# Altium PCB PCB2.PcbDoc
Units mm, origin at the board's own origin, x right, y up, seen from the top; angles counter-clockwise.
Board outline 32.51 x 48.51 mm, 2 copper layers (Top Layer, Bottom Layer); 29 components, 26 nets, 142 pads, 33 vias.
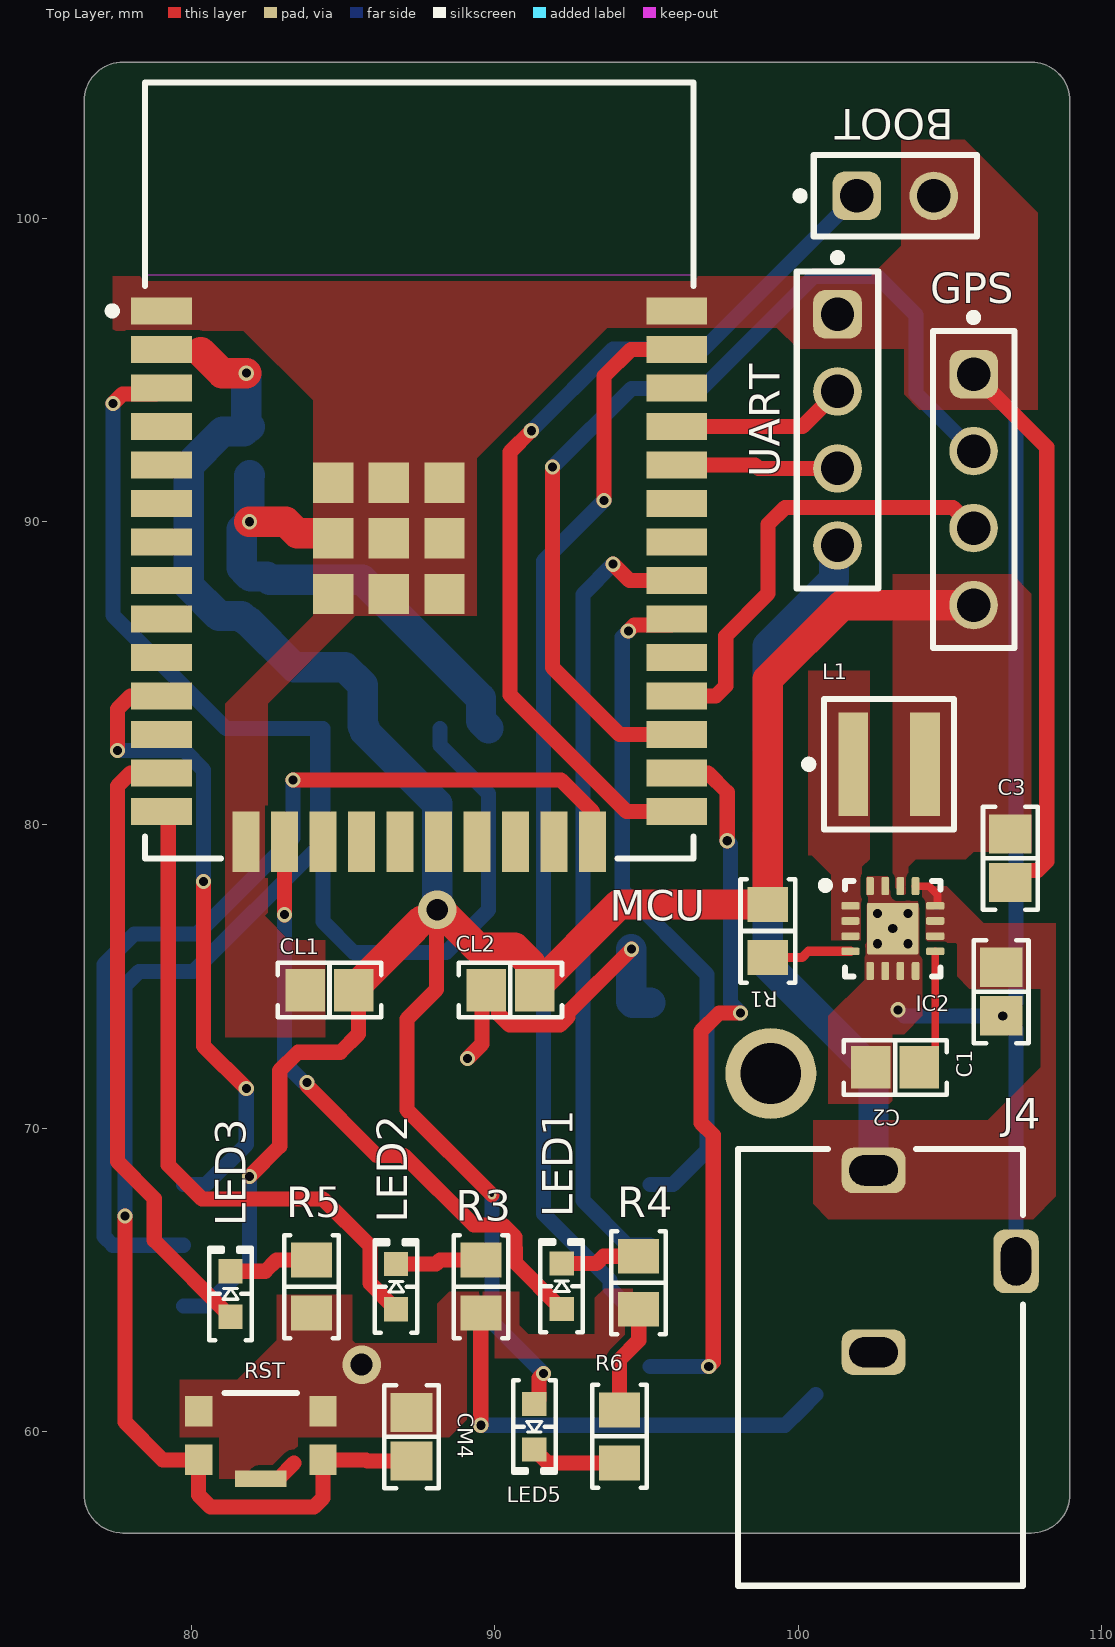
[diagram p0: Top Layer view]
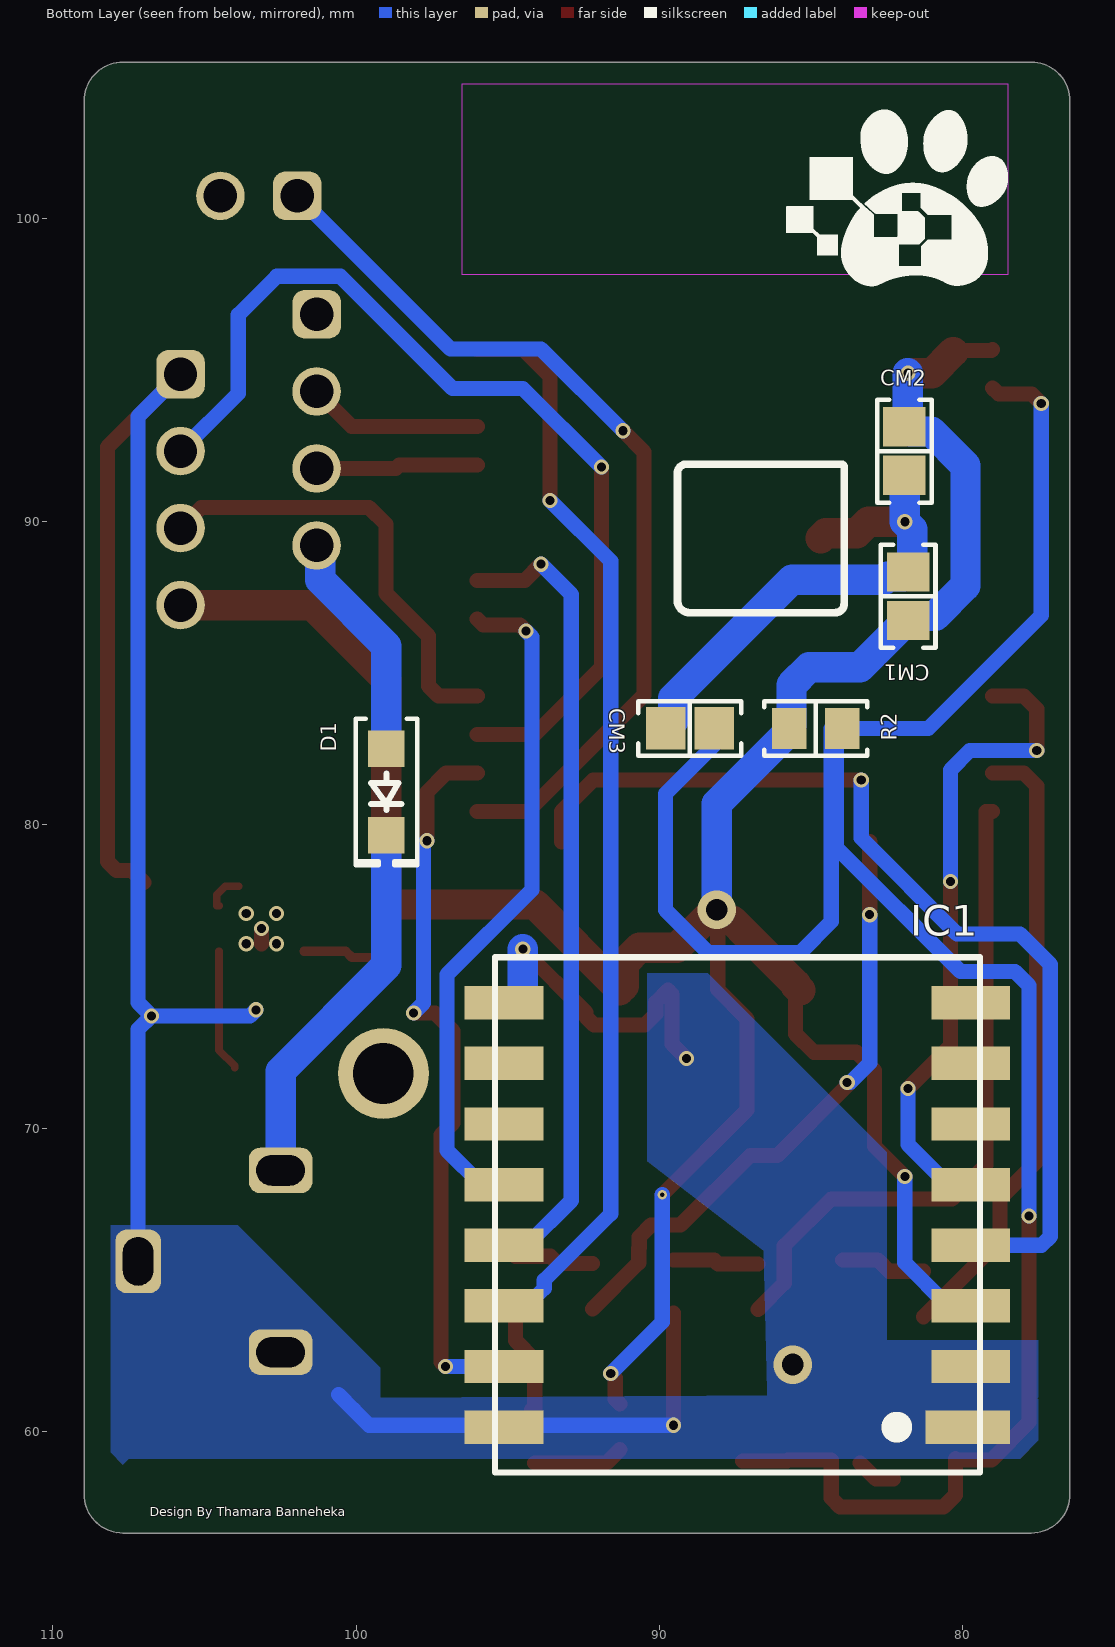
[diagram p1: Bottom Layer view, seen from below]
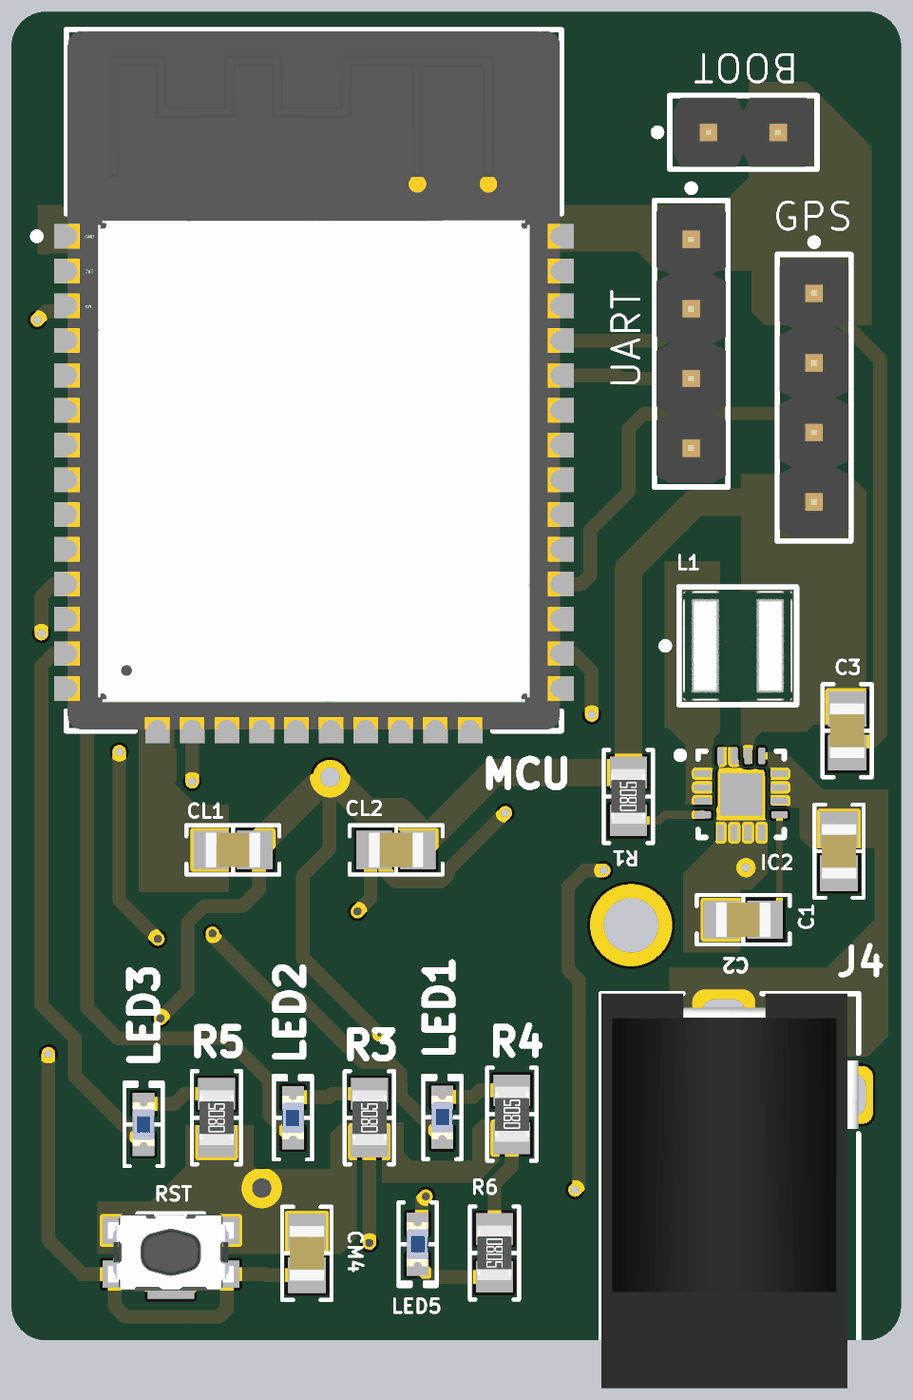
[diagram p2: 3D render of the assembled board from above, using the file's embedded part models]
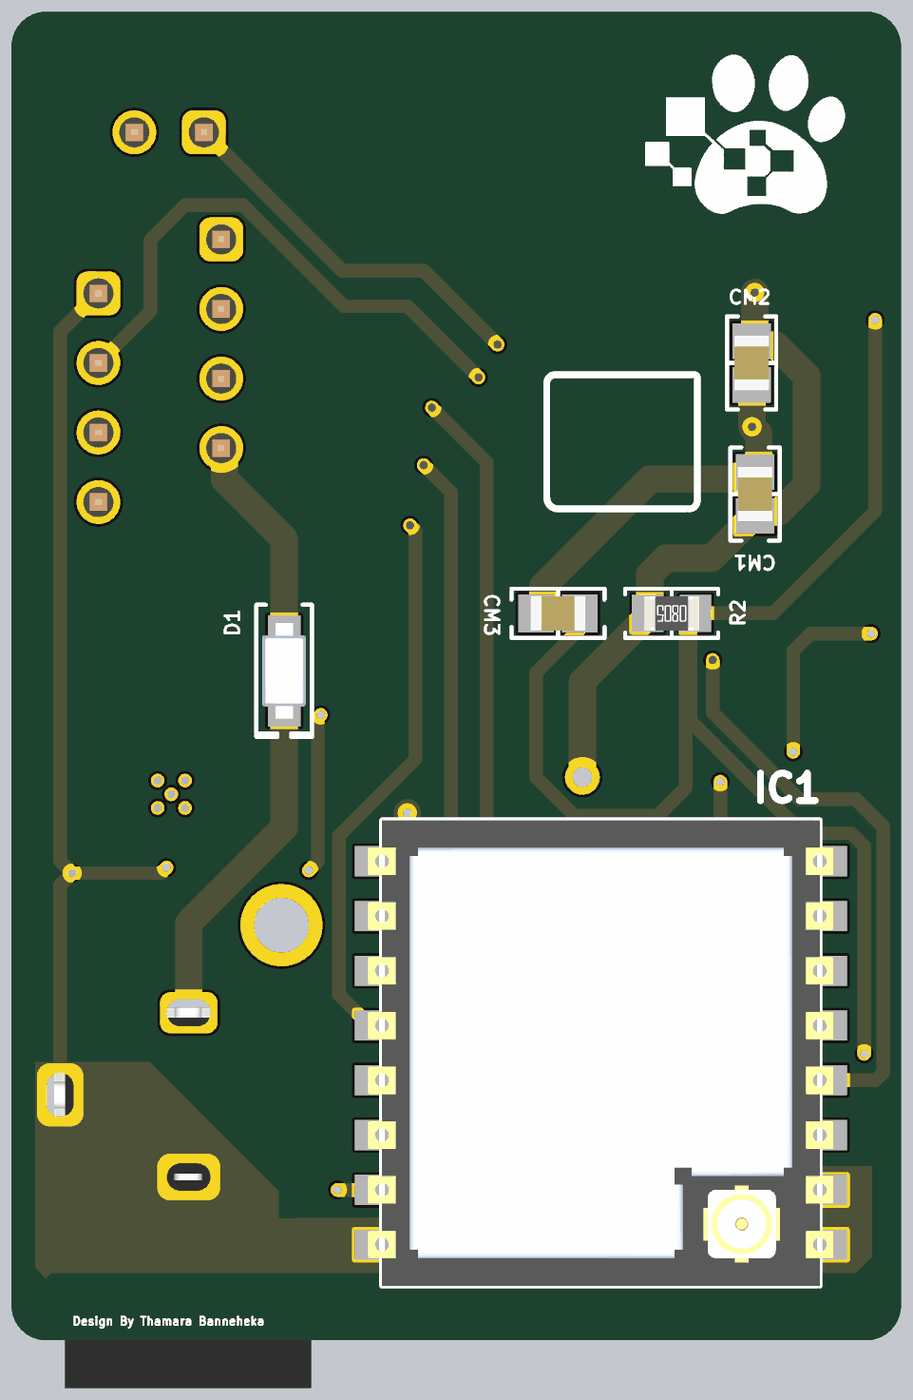
[diagram p3: 3D render of the assembled board from below, using the file's embedded part models]

## Layer stack, top to bottom
Top Solder: solder mask 0.0102, Solder Resist, Dk 3.5
Top Layer: signal copper 0.0356
Dielectric 1: dielectric 0.32, FR-4, Dk 4.8
Bottom Layer: signal copper 0.0356
Bottom Solder: solder mask 0.0102, Solder Resist, Dk 3.5

## Board outline
76.454,57.912 ccw(c77.724,57.912) 77.724,56.642 107.696,56.642 ccw(c107.696,57.912) 108.966,57.912 108.966,103.886 ccw(c107.696,103.886) 107.696,105.156 77.724,105.156 ccw(c77.724,103.886) 76.454,103.886

## Design rules (kind name [scope] priority, off if disabled: settings)
Clearance [All] p1: gap=0.2 ignorepadtopadclearanceinfootprint=FALSE
PolygonConnect [All] p1: connectstyle=Direct reliefconductorwidth=0.254 reliefentries=4 polygonreliefangle="90 Angle" airgapwidth=0.254
RoutingVias [All] p1: holewidth=0.15 width=0.3 viastyle="Through Hole" minholewidth=0.1 minwidth=0.25 maxholewidth=1 maxwidth=1.27
SolderMaskExpansion [All] p1: expansion=0.102 istentingtop=FALSE
SupplyNets "Schematic Supply Nets_2" [InNet('VIN')] p1: voltage=0.000
SupplyNets "Schematic Supply Nets_1" [InNet('GND')] p2: voltage=0.000
SupplyNets "Schematic Supply Nets" [InNet('3V3')] p3: voltage=0.000
UnConnectedPin [All] p1:
UnRoutedNet [All] p1: checkbadconnections=TRUE
UnpouredPolygon [All] p1: allowunpoured=TRUE allowshelved=TRUE
Width [All] p1: maxlimit=3 minlimit=0.254 preferedwidth=0.5 minimp=50.000000 maximp=50.000000 favimp=50.000000
28 further rules are at their usual default settings.

## Components (designator, comment, footprint, x,y, rotation, side; value= is the part's Value field where it differs from the comment)
BOOT "CMP-011-000133-1" 61300211121 103.206,100.75 r0 top
C1 "10 µF" "CAP 0805_2012" 106.7,74.5 r90 top
C2 "3300 pF" "CAP 0805_2012" 103.2,72 r0 top
C3 "0.022 µF" "CAP 0805_2012" 107,78.9 r90 top
CL1 "22 µF" "CAP 0805_2012" 84.544,74.549 r0 top
CL2 "0.1 µF" "CAP 0805_2012" 90.513,74.549 r0 top
CM1 "22 µF" "CAP 0805_2012" 81.788,87.541 r270 bottom
CM2 "0.1 µF" "CAP 0805_2012" 81.915,92.329 r90 bottom
CM3 "0.1 µF" "CAP 0805_2012" 88.989,83.185 r180 bottom
CM4 "0.1 µF" "CAP 0805_2012" 87.249,59.817 r270 top
D1 "1N4007FLTR" SOD123F 99,81.087 r270 bottom
GPS "CMP-011-000141-1" 61300411121 105.791,91.059 r270 top
IC1 "RA-02" RA-02 87.423,67.135 r0 bottom locked
IC2 "TPS62152RGTR" RGT0016C_V 103.124,76.581 r0 top locked
J4 "PJ-102AH" "CUI PJ-102AH" 102.489,62.103 r180 top
L1 "2.2uH" FP-XFL4020-MFG 103,82 r0 top
LED1 "Blue" "LED 0603_1608 BLUE" 92.202,64.782 r90 top
LED2 "Blue" "LED 0603_1608 BLUE" 86.741,64.77 r90 top
LED3 "Blue" "LED 0603_1608 BLUE" 81.28,64.528 r90 top
LED5 "Blue" "LED 0603_1608 BLUE" 91.3,60.15 r270 top
MCU "ESP32-WROOM-32" FP-ESP32-WROOM-32-MFG 87.503,91.694 r0 top locked
R1 "100 k" "RES 0805_2012" 99,76.5 r90 top
R2 "10 k" "RES 0805_2012" 84.836,83.185 r0 bottom
R3 "1 k" "RES 0805_2012" 89.535,64.77 r90 top
R4 "1 k" "RES 0805_2012" 94.742,64.897 r90 top
R5 "1 k" "RES 0805_2012" 83.947,64.77 r90 top
R6 "1 k" "RES 0805_2012" 94.107,59.831 r270 top
RST "KMR221GLFS" SW_KMR221GLFS 82.278,59.855 r180 top
UART "CMP-011-000141-1" 61300411121 101.3,93.03 r270 top

## Footprints (in the part's own frame and the unit in brackets; to place one, negate y for a bottom-side part, rotate by r counter-clockwise, add the part's x,y. Pads: shape width x height; smd on the part's side, far side on the other; paste and mask are expansions set on the pad)
61300211121 [mm] "Pin Header, pitch 2.54 mm, THT, Vertical, single row, 2p"
  rrect50% 1.6x1.6 hole 1.1: 1(-1.27,0)
  round 1.6 hole 1.1: 2(1.27,0)
  silkscreen extent -3.26,-1.34 2.69,1.35, body extent -2.54,-1.27 2.54,1.27, height 8.57
61300411121 [mm] "Pin Header, pitch 2.54 mm, THT, Vertical, single row, 4p"
  rrect50% 1.6x1.6 hole 1.1: 1(-3.81,0)
  round 1.6 hole 1.1: 2(-1.27,0) 3(1.27,0) 4(3.81,0)
  silkscreen extent -5.8,-1.34 5.23,1.34, body extent -5.08,-1.27 5.08,1.27, height 8.57
"CAP 0805_2012" [mm] "Chip Capacitor, 2-Leads, Body 2.00x1.20mm, IPC Medium Density"
  rect 1.3x1.4 smd: 1(-0.8,0) 2(0.8,0)
  silkscreen extent -1.7,-0.9 1.7,0.9, body extent -1,-0.64 1,0.64, height 1.26
"CUI PJ-102AH" [mm] "DC Barrel Jack W/ Switch 2.0x5.5"
  rrect50% 2.1x1.5 hole 1 slot 1.6 at 0 deg: 1(0,-6.5) 2(0,-0.5)
  rrect50% 1.5x2.1 hole 1 slot 1.6 at 90 deg: 3(-4.7,-3.5)
  silkscreen extent -4.93,-7.2 4.48,7.2, body extent -4.92,-7.2 4.47,7.2, height 11
FP-ESP32-WROOM-32-MFG [mm]
  rect 2x0.9 smd paste+0 mask+0: 1(-8.5,5.26) 2(-8.5,3.99) 3(-8.5,2.72) 4(-8.5,1.45) 5(-8.5,0.18) 6(-8.5,-1.09) 7(-8.5,-2.36) 8(-8.5,-3.63) 9(-8.5,-4.9) 10(-8.5,-6.17) 11(-8.5,-7.44) 12(-8.5,-8.71) 13(-8.5,-9.98) 14(-8.5,-11.25) 25(8.5,-11.25) 26(8.5,-9.98) 27(8.5,-8.71) 28(8.5,-7.44) 29(8.5,-6.17) 30(8.5,-4.9) 31(8.5,-3.63) 32(8.5,-2.36) 33(8.5,-1.09) 34(8.5,0.18) 35(8.5,1.45) 36(8.5,2.72) 37(8.5,3.99) 38(8.5,5.26)
  rect 0.9x2 smd paste+0 mask+0: 15(-5.715,-12.25) 16(-4.445,-12.25) 17(-3.175,-12.25) 18(-1.905,-12.25) 19(-0.635,-12.25) 20(0.635,-12.25) 21(1.905,-12.25) 22(3.175,-12.25) 23(4.445,-12.25) 24(5.715,-12.25)
  rect 1.33x1.33 smd paste+0 mask+0: 39(-2.835,-4.075) 39(-2.835,-2.24) 39(-2.835,-0.405) 39(-1,-4.075) 39(-1,-2.24) 39(-1,-0.405) 39(0.835,-4.075) 39(0.835,-2.24) 39(0.835,-0.405)
  Keep-Out Layer region: -9,6.45 9,6.45 9,12.75 -9,12.75
  Keep-Out Layer region: -9,6.45 9,6.45 9,12.75 -9,12.75
  silkscreen extent -10.25,-12.8 9.05,12.8, body extent -9.6,-13.35 9.6,12.9, height 0.25
FP-XFL4020-MFG [mm]
  rect 0.98x3.4 smd paste+0 mask+0: 1(-1.185,0) 2(1.185,0)
  silkscreen extent -2.77,-2.15 2.15,2.15, body extent -2.25,-2.25 2.25,2.25, height 0.25
"LED 0603_1608 BLUE" [mm] "Chip Diode, 2-Leads, Body 1.60x0.80mm, IPC Medium Density"
  rect 0.8x0.8 smd: 1(-0.75,0) 2(0.75,0)
  silkscreen extent -1.52,-0.7 1.52,0.7, body extent -0.8,-0.4 0.8,0.4, height 0.53
RA-02 [mm]
  rect 2.8x1.1 smd: 1(-7.6,7)
  rect 2.6x1.1 smd: 2(-7.7,5) 3(-7.7,3) 4(-7.7,1) 5(-7.7,-1) 6(-7.7,-3) 7(-7.7,-5) 8(-7.7,-7) 9(7.7,-7) 10(7.7,-5) 11(7.7,-3) 12(7.7,-1) 13(7.7,1) 14(7.7,3) 15(7.7,5) 16(7.7,7)
  silkscreen extent -8,-8.5 8,8.5, body extent -8.5,-8.5 8.5,8.5, height 3.3
"RES 0805_2012" [mm] "Chip Resistor, 2-Leads, Body 2.00x1.25mm, IPC Medium Density"
  rect 1.15x1.35 smd: 1(-0.875,0) 2(0.875,0)
  silkscreen extent -1.7,-0.9 1.7,0.9, body extent -1,-0.62 1,0.63, height 0.6
RGT0016C_V [mm] "QFN, 16-Leads, Body 3x3mm, Pitch 0.5mm, Thermal Pad 1.65x1.65mm"
  rrect40% 0.6x0.25 smd: 1(-1.4,0.75) 2(-1.4,0.25) 3(-1.4,-0.25) 4(-1.4,-0.75) 9(1.4,-0.75) 10(1.4,-0.25) 11(1.4,0.25) 12(1.4,0.75)
  rrect40% 0.25x0.6 smd: 5(-0.75,-1.4) 6(-0.25,-1.4) 7(0.25,-1.4) 8(0.75,-1.4) 13(0.75,1.4) 14(0.25,1.4) 15(-0.25,1.4) 16(-0.75,1.4)
  rrect6% 1.7x1.7 smd paste-0.85: 17(0,0)
  rrect6% 1.55x1.55 on Top Paste: 17(0,0)
  silkscreen extent -2.35,-1.58 1.58,1.58, body extent -1.5,-1.5 1.5,1.5, height 1
SOD123F [mm] "SODFL, 2-Leads, Body 1.60x3.50mm, IPC Medium Density"
  rect 1.2x1.2 smd: 1(-1.43,0) 2(1.43,0)
  silkscreen extent -2.41,-1.02 2.41,1.02, body extent -1.75,-0.8 1.75,0.8, height 1.1
SW_KMR221GLFS [mm]
  rect 0.9x1 smd: 1(-2.05,0.8) 2(-2.05,-0.8) 3(2.05,-0.8) 4(2.05,0.8)
  rect 1.7x0.55 smd: 5(0,1.425)
  silkscreen extent -1.2,-1.4 1.2,-1.4, body extent -2.3,-1.4 2.3,1.4, height 1.9

## Part data
BOOT: "WR-PHD Pin Header, THT, Vertical, pitch 2.54mm, 1 Row, 2P", Contact Resistance=20mOhm, manufacturer="Wurth Elektronik", Manufacturer Part Number=61300211121, Operating Temperature Max=105°C, Operating Temperature Min=-40°C, Rated Current=3A, Withstanding Voltage=500V, Working Voltage=250V, Category="Board-to-Board Connectors", Component Type=Standard, componentlink1description="Website Link", componentlink1url=https://www.we-online.com/redexpert/article/61300211121?ad, componentlink2description="Datasheet Link", componentlink2url=https://www.we-online.com/redexpert/spec/61300211121?ad, Design Item ID=61300211121, Gender="Pin Header", Match Code=WR-PHD, Mount="Through Hole", Number of Pins=2, Number of Rows=1, Orientation=Vertical, packaging=Bag, Pin Count=2, Pitch=2.54mm, Source=WR-PHD.SchLib
C1: library part C2012X6S1C106K125AC, "CAP CER 10UF 16V X6S 0805", Device Package="0805 (2012 Metric)", manufacturer="TDK Corporation", Operating Temperature="-55°C ~ 105°C", Supplier Part Number 1=445-7611-1-ND, Temperature Coefficient=X6S, Tolerance=±10%, Voltage - Rated=16V, Applications="General Purpose", Capacitance="10 µF", componentlink1description=Datasheet, componentlink1url=https://product.tdk.com/info/en/catalog/datasheets/mlcc_commercial_general_en.pdf?ref_disty=digikey, componentlink2description="DigiKey Link", componentlink2url=https://www.digikey.com/en/products/detail/tdk-corporation/C2012X6S1C106K125AC/2733046, Features="Low ESL", lastupdated="2/9/2024 8:16:08 PM", Lifecycle Status=Active, Minimum Order=1, Mounting Type="Surface Mount, MLCC", Package / Case="0805 (2012 Metric)", packaging=TapeAndReel, Part Number=C2012X6S1C106K125AC, Part Status=Active, partid=2995, price=0.06, series=C, Size / Dimension="0.079\" L x 0.049\" W (2.00mm x 1.25mm)", Supplier 1=DigiKey, Thickness (Max)="0.057\" (1.45mm)"
C2: library part C0805C332F5GECAUTO, "CAP CER 0805 3.3NF 50V C0G 1%", Capacitance="3.3 nF", Device Package="0805 (2012 Metric)", manufacturer=KEMET, Operating Temperature="-55°C ~ 125°C", Ratings=AEC-Q200, Supplier Part Number 1=399-C0805C332F5GECAUTOCT-ND, Temperature Coefficient="C0G, NP0", Tolerance=±1%, Voltage - Rated=50V, Applications="Automotive, ESD Protection", componentlink1description=Datasheet, componentlink1url=https://api.kemet.com/component-edge/download/datasheet/C0805C332F5GECAUTO.pdf, componentlink2description="DigiKey Link", componentlink2url=https://www.digikey.com/en/products/detail/kemet/C0805C332F5GECAUTO/8647273, Features="Low ESL", lastupdated="2/9/2024 8:15:00 PM", Lifecycle Status=Active, Minimum Order=1, Mounting Type="Surface Mount, MLCC", Package / Case="0805 (2012 Metric)", packaging=TapeAndReel, Part Number=C0805C332F5GECAUTO, Part Status=Active, partid=41544, price=0.27, series="ESD SMD Auto C0G", Size / Dimension="0.079\" L x 0.049\" W (2.00mm x 1.25mm)", Supplier 1=DigiKey, Thickness (Max)="0.035\" (0.88mm)"
C3: library part C0805C223K5RECAUTO, "CAP CER 0805 22NF 50V X7R 10%", Capacitance="22 uF", Device Package="0805 (2012 Metric)", manufacturer=KEMET, Operating Temperature="-55°C ~ 125°C", Ratings=AEC-Q200, Supplier Part Number 1=399-17886-1-ND, Temperature Coefficient=X7R, Tolerance=±10%, Voltage - Rated=50V, Applications="Automotive, ESD Protection", componentlink1description=Datasheet, componentlink1url=https://api.kemet.com/component-edge/download/datasheet/C0805C223K5RECAUTO.pdf, componentlink2description="DigiKey Link", componentlink2url=https://www.digikey.com/en/products/detail/kemet/C0805C223K5RECAUTO/8640480, lastupdated="2/9/2024 8:15:30 PM", Lifecycle Status=Active, Minimum Order=1, Mounting Type="Surface Mount, MLCC", Package / Case="0805 (2012 Metric)", packaging=TapeAndReel, Part Number=C0805C223K5RECAUTO, Part Status=Active, partid=15719, price=0.04, series="ESD SMD Auto X7R", Size / Dimension="0.079\" L x 0.049\" W (2.00mm x 1.25mm)", Supplier 1=DigiKey, Thickness (Max)="0.035\" (0.88mm)"
CL1 CM1: library part CL21A226KOQNNNG, "CAP CER 22UF 16V X5R 0805", Device Package="0805 (2012 Metric)", manufacturer="Samsung Electro-Mechanics", Operating Temperature="-55°C ~ 85°C", Supplier Part Number 1=1276-7092-1-ND, Temperature Coefficient=X5R, Tolerance=±10%, Voltage - Rated=16V, Applications="General Purpose", Capacitance="22 µF", componentlink1description=Datasheet, componentlink1url=//media.digikey.com/pdf/Data%20Sheets/Samsung%20PDFs/CL21A226KOQNNNG_Spec.pdf, componentlink2description="DigiKey Link", componentlink2url=https://www.digikey.com/en/products/detail/samsung-electro-mechanics/CL21A226KOQNNNG/3894433, lastupdated="2/9/2024 8:16:07 PM", Lifecycle Status=Active, Minimum Order=1, Mounting Type="Surface Mount, MLCC", Package / Case="0805 (2012 Metric)", packaging=TapeAndReel, Part Number=CL21A226KOQNNNG, Part Status=Active, partid=3000, price=0.06, series=CL, Size / Dimension="0.079\" L x 0.049\" W (2.00mm x 1.25mm)", Supplier 1=DigiKey, Thickness (Max)="0.055\" (1.40mm)"
CL2 CM2 CM3 CM4: library part CC0805MRX7R9BB104, "CAP CER 0.1UF 50V X7R 0805", Device Package="0805 (2012 Metric)", manufacturer=Yageo, Operating Temperature="-55°C ~ 125°C", Supplier Part Number 1=311-4351-1-ND, Temperature Coefficient=X7R, Tolerance=±20%, Voltage - Rated=50V, Applications="General Purpose", Capacitance="0.1 µF", componentlink1description=Datasheet, componentlink1url=https://www.yageo.com/upload/media/product/productsearch/datasheet/mlcc/UPY-GPHC_X7R_6.3V-to-50V_18.pdf, componentlink2description="DigiKey Link", componentlink2url=https://www.digikey.com/en/products/detail/yageo/CC0805MRX7R9BB104/5884281, lastupdated="2/9/2024 8:16:09 PM", Lifecycle Status=Active, Minimum Order=1, Mounting Type="Surface Mount, MLCC", Package / Case="0805 (2012 Metric)", packaging=TapeAndReel, Part Number=CC0805MRX7R9BB104, Part Status=Active, partid=2475, price=0.01, series=CC, Size / Dimension="0.079\" L x 0.049\" W (2.00mm x 1.25mm)", Supplier 1=DigiKey, Thickness (Max)="0.037\" (0.95mm)"
D1: "STANDARD RECTIFIER 1000V SOD-123", Capacitance @ Vr, F="15pF @ 4V, 1MHz", Current - Average Rectified (Io)=1A, Current - Reverse Leakage @ Vr="5µA @ 1000V", manufacturer="SMC Diode Solutions", Package / Case=SOD-123F, Supplier Device Package=SOD-123FL, Supplier Part Number 1=1655-1N4007FLCT-ND, Voltage - DC Reverse (Vr) (Max)=1000V, Voltage - Forward (Vf) (Max) @ If="1.1V @ 1A", componentlink1description=Datasheet, componentlink1url=http://www.smc-diodes.com/propdf/1N4001FL-1N4007FL%20N1646%20REV.A.pdf, componentlink2description="DigiKey Link", componentlink2url=http://digikey.com/product-detail/en/smc-diode-solutions/1N4007FLTR/1655-1N4007FLCT-ND/11657827, Diode Type=Standard, lastupdated="8/30/2020 8:59:55 PM", Lifecycle Status=Active, Minimum Order=1, Mounting Type="Surface Mount", packaging=TapeAndReel, Part Number=1N4007FLTR, partid=3314, price=0.01, Speed="Standard Recovery >500ns, > 200mA (Io)", Supplier 1=DigiKey
GPS UART: "WR-PHD Pin Header, THT, Vertical, pitch 2.54mm, 1 Row, 4P", Contact Resistance=20mOhm, manufacturer="Wurth Elektronik", Manufacturer Part Number=61300411121, Operating Temperature Max=105°C, Operating Temperature Min=-40°C, Rated Current=3A, Withstanding Voltage=500V, Working Voltage=250V, Category="Board-to-Board Connectors", Component Type=Standard, componentlink1description="Website Link", componentlink1url=https://www.we-online.com/redexpert/article/61300411121?ad, componentlink2description="Datasheet Link", componentlink2url=https://www.we-online.com/redexpert/spec/61300411121?ad, Design Item ID=61300411121, Gender="Pin Header", Match Code=WR-PHD, Mount="Through Hole", Number of Pins=4, Number of Rows=1, Orientation=Vertical, packaging=Bag, Pin Count=4, Pitch=2.54mm, Source=WR-PHD.SchLib
IC1: library part CMP-006-000001-1, "General ISM < 1GHz LoRaâ„¢ Transceiver Module 410MHz ~ 525MHz Antenna Not Included, I-PEX Surface Mount", Package=None, Availability="Not in stock", Check_prices=https://www.snapeda.com/parts/RA-02/AI-Thinker/view-part/?ref=eda, Component Type=Standard, Design Item ID=RA-02, MF=Ai-Thinker, MP=RA-02, Pin Count=16, price=None, SnapEDA_Link=https://www.snapeda.com/parts/RA-02/AI-Thinker/view-part/?ref=snap, Source=RA-02.SchLib
IC2: library part CMP-0323-00110-3, "Buck Step Down Regulator with 3 to 17 V Input and 3.3 V Output, -40 to 85 degC, 16-Pin QFN (RGT), Green (RoHS & no Sb/Br)", manufacturer="Texas Instruments", Rating=Catalog, Switch Current Limit(Typ)(A)=1.7, Code_JEDEC=MO-220, componentlink1description=Datasheet, componentlink1url=http://www.ti.com/general/docs/lit/getliterature.tsp?genericPartNumber=TPS62152&fileType=pdf, componentlink2description="Package Specification", componentlink2url=http://www.ti.com/litv/pdf/mpqf119g, ComponentLink3Description="URL Link1", ComponentLink3URL="Samples URL:http://www.ti.com/product/tps62152#samples", DatasheetVersion=SLVSAL5, Duty Cycle(Max)(%)=100, Eco-Plan="Green (RoHS & no Sb/Br)", Iout(Max)(A)=1, Iq(Typ)(mA)=0.017, Mounting Technology="Surface Mount", PackageDescription="16-Pin Plastic Quad Flat No-Lead, 3 x 3 mm Body, 0.5 mm Pitch, 1.7 x 1.7 mm Exposed Pad", PackageReference=RGT0016C, PackageVersion="revH, Oct-2011", PartNumber=TPS62152RGTR, Preset Vout(V)=3.3, Regulated Outputs(#)=1, SubFamily="Step-Down Regulator", Synchronous Rectification=TRUE, Topology=Buck, Vin(Max)(V)=17, Vin(Min)(V)=3, Vout(Max)(V)=3.3, Vout(Min)(V)=3.3
J4: "CONN PWR JACK 2X5.5MM SOLDER", Current Rating (Amps)=5A, manufacturer="CUI Devices", Material Flammability Rating="UL94 V-0", Supplier Part Number 1=CP-102AH-ND, Voltage - Rated=24VDC, Actual Diameter="0.079\" (2.00mm ID), 0.256\" (6.50mm OD)", componentlink1description=Datasheet, componentlink1url=https://www.cuidevices.com/product/resource/digikeypdf/pj-102ah.pdf, componentlink2description="DigiKey Link", componentlink2url=//digikey.com/product-detail/en/cui-devices/PJ-102AH/CP-102AH-ND/408448, Connector Type=Jack, Gender=Male, Industry Recognized Mating Diameter="2.00mm ID (0.079\"), 5.50mm OD (0.217\")", Internal Switch(s)="Single Switch, Normally Closed", lastupdated="12/16/2019 7:01:27 PM", Lifecycle Status=0, Mating Length/Depth="0.354\" (9.00mm)", Minimum Order=1, Mounting Type="Through Hole, Right Angle", Number of Positions/Contacts="2 Conductors, 3 Contacts", packaging=Tray, Part Number=PJ-102AH, Part Status=Active, price=0.76, series=-, Shielding=Unshielded, Supplier 1=DigiKey, Termination=Solder
L1: library part CMP-2000-05090-4, "INDUCTOR, 2.2UH, 8A, 20%, 38MHZ, REEL", Case/Package=SMD/SMT, DC Resistance (DCR)=23.5mR, Inductance Tolerance=20%, Max DC Current=8A, Max Operating Temperature=125°C, Min Operating Temperature=-40°C, Saturation Current=3.1A, Self Resonant Frequency=38MHz, Test Frequency=100kHz, Core Material=Composite, Height=2.1mm, Inductance=2.2uH, Lead Free="Contains Lead", Length=4.3mm, Mount="Surface Mount", packaging="Tape and Reel", REACH SVHC="No SVHC", RMS Current (Irms)=8A, RoHS Compliant=Yes, series=XFL4020, Shielding=Shielded, Termination=SMD/SMT, Tolerance=20%, Width=4.3mm
LED1 LED2 LED3: library part SM0603UBWC, "LED BLUE CLEAR 0603 SMD", Current - Test=20mA, Device Package="0603 (1608 Metric)", Lens Color=Colorless, manufacturer="Bivar Inc.", Millicandela Rating=115mcd, Supplier Device Package=0603, Supplier Part Number 1=492-1327-1-ND, Voltage - Forward (Vf) (Typ)=3V, Color=Blue, componentlink1description=Datasheet, componentlink1url=https://www.bivar.com/Files/Datasheets/SM0603UBWC.pdf, componentlink2description="DigiKey Link", componentlink2url=https://www.digikey.com/en/products/detail/bivar-inc/SM0603UBWC/2408546, Configuration=Standard, Height (Max)=0.80mm, lastupdated="6/3/2024 7:57:52 PM", Lens Size="1.00mm x 0.80mm", Lens Style="Rectangle with Flat Top", Lens Transparency=Clear, Lifecycle Status=Active, Minimum Order=1, Mounting Type="Surface Mount", Package / Case="0603 (1608 Metric)", packaging=TapeAndReel, Part Number=SM0603UBWC, Part Status=Active, partid=807, price=0.46, series=-, Size / Dimension="1.60mm L x 0.80mm W", Supplier 1=DigiKey, Viewing Angle=130°, Wavelength - Dominant=470nm, Wavelength - Peak=468nm
LED5: library part LSM0603463V, "LED BLUE CLEAR CHIP 0603 SMD", Current - Test=20mA, Device Package="0603 (1608 Metric)", Lens Color=Colorless, manufacturer="Visual Communications Company - VCC", Millicandela Rating=20mcd, Supplier Device Package="Chip LED", Supplier Part Number 1=LSM0603463VCT-ND, Voltage - Forward (Vf) (Typ)=3V, Color=Blue, componentlink1description=Datasheet, componentlink1url=https://vcclite.com/wp-content/uploads/wpallimport/files/files/LSM0603463V.pdf, componentlink2description="DigiKey Link", componentlink2url=https://www.digikey.com/en/products/detail/visual-communications-company-vcc/LSM0603463V/9486725, Configuration=Standard, Height (Max)=0.50mm, lastupdated="6/3/2024 7:57:52 PM", Lens Size="1.20mm x 0.80mm", Lens Style="Rectangle with Flat Top", Lens Transparency=Clear, Lifecycle Status=Active, Minimum Order=1, Mounting Type="Surface Mount", Package / Case="0603 (1608 Metric)", packaging=TapeAndReel, Part Number=LSM0603463V, Part Status=Active, partid=781, price=0.12, series=LSM0603, Size / Dimension="1.60mm L x 0.80mm W", Supplier 1=DigiKey, Viewing Angle=120°, Wavelength - Dominant=469nm, Wavelength - Peak=469nm
MCU: library part CMP-194065-000008-1, "RX TXRX MOD WIFI SURFACE MOUNT", Case/Package=SMD/SMT, Frequency=2.5GHz, Max Operating Temperature=85°C, Min Operating Temperature=-40°C, Operating Supply Voltage=3.6V, Package Quantity=550, Data Rate=150Mbps, Mount="Surface Mount", packaging="Cut Tape", Sensitivity=-98dBm, Weight=0.088185oz
R1 R2: library part RCS0805100KFKEA, "RES SMD 100K OHM 1% 1/2W 0805", Device Package="0805 (2012 Metric)", manufacturer="Vishay Dale", Operating Temperature="-55°C ~ 155°C", Power (Watts)="0.5W, 1/2W", Ratings=AEC-Q200, Resistance="100 kOhms", Supplier Device Package=0805, Supplier Part Number 1=541-2850-1-ND, Temperature Coefficient=±100ppm/°C, Tolerance=±1%, componentlink1description=Datasheet, componentlink1url=http://www.vishay.com/docs/20065/rcse3.pdf, componentlink2description="DigiKey Link", componentlink2url=https://www.digikey.com/en/products/detail/vishay-dale/RCS0805100KFKEA/5866996, Composition="Thick Film", Features="Automotive AEC-Q200, Pulse Withstanding", Height - Seated (Max)="0.020\" (0.50mm)", lastupdated="2/8/2024 9:02:38 PM", Lifecycle Status=Active, Minimum Order=1, Number of Terminations=2, Package / Case="0805 (2012 Metric)", packaging=TapeAndReel, Part Number=RCS0805100KFKEA, Part Status=Active, partid=27789, price=0.02, series="RCS e3", Size / Dimension="0.079\" L x 0.049\" W (2.00mm x 1.25mm)", Supplier 1=DigiKey
R3 R4 R5 R6: library part RCS0805100KFKEA, "RES SMD 100K OHM 1% 1/2W 0805", Device Package="0805 (2012 Metric)", manufacturer="Vishay Dale", Operating Temperature="-55°C ~ 155°C", Power (Watts)="0.5W, 1/2W", Ratings=AEC-Q200, Resistance="1 kOhms", Supplier Device Package=0805, Supplier Part Number 1=541-2850-1-ND, Temperature Coefficient=±100ppm/°C, Tolerance=±1%, componentlink1description=Datasheet, componentlink1url=http://www.vishay.com/docs/20065/rcse3.pdf, componentlink2description="DigiKey Link", componentlink2url=https://www.digikey.com/en/products/detail/vishay-dale/RCS0805100KFKEA/5866996, Composition="Thick Film", Features="Automotive AEC-Q200, Pulse Withstanding", Height - Seated (Max)="0.020\" (0.50mm)", lastupdated="2/8/2024 9:02:38 PM", Lifecycle Status=Active, Minimum Order=1, Number of Terminations=2, Package / Case="0805 (2012 Metric)", packaging=TapeAndReel, Part Number=RCS0805100KFKEA, Part Status=Active, partid=27789, price=0.02, series="RCS e3", Size / Dimension="0.079\" L x 0.049\" W (2.00mm x 1.25mm)", Supplier 1=DigiKey
RST: library part CMP-009-000003-1, "Switch Tactile N.O. SPST Button Gull Wing 0.05A 32VDC 1VA 200000Cycles 2N SMD Automotive T/R", Package=None, Availability=Unavailable, Component Type=Standard, Design Item ID=KMR221GLFS, MP=KMR221GLFS, Pin Count=5, price=None, Source=KMR221GLFS.SchLib

## Free pads (board coordinates)
  round 3 hole 2: 5(99.1,71.8)

## Via types
v1: diameter 0.5, hole 0.3, Top Layer to Bottom Layer, 30 vias
v2: diameter 1.27, hole 0.711, Top Layer to Bottom Layer, 2 vias
v3: diameter 0.3, hole 0.15, Top Layer to Bottom Layer, 1 vias

## Nets (pads, with @x,y where several pads share a name; then routed paths per layer and width w, separated by ;. In a path a pad name is that pad's centre, name@x,y a point inside that pad or via, vN(x,y) a via of type N, cw(c..) or ccw(c..) an arc to the next point about the centre after c; other vN are vias at no path point)
3V3: C3.2 CL1.2 CL2.2 CM1.2 CM2.2 GPS.4 IC1.3 IC2.14 L1.2 LED5.1 MCU.2 R1.2 R2.2 | length 92.3
  Top Layer w0.5: MCU.2 79.039,95.648 80.252,95.648 ; v1(81.9,68.4) 82.9,69.4 82.9,71.9 83.5,72.5 84.9,72.5 85.5,73.1 85.5,74.393 CL1.2 ; 86.843,75.87 86.64,75.87 86.843,76.073 ; v2@88.07,77.2 88.07,76.848 88.07,74.57 87.1,73.6 87.1,70.6 v3(89.9,67.8) ; LED5.1 91.45,61.05 91.45,61.75 v1(91.6,61.9)
  Top Layer w1: 80.3,95.6 81,94.9 v1(81.8,94.9) ; CL1.2 85.494,74.699 85.494,74.749 86.628,75.883 87.097,76.352 v2@87.593,76.848 ; v2(88.1,77.2) 88.173,77.2 89.424,75.949 90.653,75.949 91.163,75.439 91.163,74.699 CL2.2 91.313,74.599 94.089,77.375 R1.2 99,84.8 101.449,87.249 GPS.4
  Bottom Layer w0.5: IC1.3 80.473,64.135 81.9,65.562 v1(81.9,68.4) ; v3(89.9,67.8) 89.9,63.6 v1(91.6,61.9)
  Bottom Layer w1: v1(81.8,94.9) 81.8,93.244 CM2.2 81.865,93.129 81.715,92.979 81.025,92.979 79.9,91.854 79.9,87.889 80.898,86.891 81.002,86.891 81.638,86.891 CM1.2 81.838,86.741 83.379,85.2 85.05,85.2 85.636,84.614 85.636,83.26 R2.2 85.711,83.085 88.1,80.696 v2(88.1,77.2)
EN: CM3.2 CM4.2 MCU.3 R2.1 RST.1 RST.4 | length 76.1
  Top Layer w0.5: v1(77.4,93.9) 77.714,94.214 78.803,94.214 MCU.3 ; v1(77.8,67.1) 77.8,60.3 79.045,59.055 RST.4 ; RST.4@80.228,59.105 80.228,57.893 80.521,57.6 80.621,57.5 84.035,57.5 84.328,57.793 RST.1 85.75,59.055 85.788,59.017 CM4.2
  Bottom Layer w0.5: v1(77.4,93.9) 77.4,86.913 81.128,83.185 R2.1 R2.1@84.15,83.185 ; v1(77.8,67.1) 77.8,74.698 78.26,75.159 80.061,75.159 84.15,79.248 R2.1@84.15,83.185 ; CM3.2 88.189,82.626 89.789,81.026 89.789,77.191 88.392,75.794 85.344,75.794 84.324,76.813 84.324,83.185 R2.1@84.15,83.185
GND: BOOT.2 C1.1 C2.1 C3.1 CL1.1 CL2.1 CM1.1 CM2.1 CM3.1 CM4.1 GPS.1 IC1.1 IC1.2 IC1.9 IC1.16 IC2.5 IC2.6 IC2.7 IC2.8 IC2.15 IC2.16 IC2.17@103.124,76.581 J4.2 J4.3 MCU.1 MCU.15 MCU.38 MCU.39 R3.1 R4.1 R5.1 R6.1 RST.2 RST.3 RST.5 UART.1 | length 101.4
  Top Layer w0.5: RST.5 82.855,58.43 83.378,58.953 ; v1(89.1,72.3) 89.577,72.777 89.577,74.413 CL2.1 90.113,74.149 90.113,73.763 90.477,73.399 92.149,73.399 92.413,73.663 92.413,73.813 v1(94.5,75.9) ; v1(89.535,60.198) R3.1 ; R6.1@94.207,60.706 R6.1 94.107,62.357 94.742,62.992 R4.1 ; IC2.17@103.124,76.073 v1(103.124,76.581) ; GPS.1 108.2,92.46 108.2,78.793 107.907,78.5 107.4,78.5 C3.1
  Top Layer w1: v1(81.9,90) 83.1,90 83.481,89.619 84.503,89.619 MCU.39@84.668,89.454
  Bottom Layer w0.5: v1(89.535,60.198) 99.568,60.198 100.076,60.706 100.584,61.214 ; v1(103.3,73.9) 103.5,73.7 v1(106.75,73.7) ; GPS.1 107.189,93.471 107.189,74.139 v1(106.75,73.7) ; J4.3 107.189,73.261 v1(106.75,73.7)
  Bottom Layer w1: CM2.1 81.9,91.514 v1(81.9,90) 81.65,89.75 81.65,88.479 CM1.1 81.938,88.191 82.474,88.191 82.574,88.091 85.623,88.091 89.539,84.175 89.539,83.485 89.539,83.435 CM3.1 ; v1(94.5,75.9) 94.5,74.185 94.55,74.135 IC1.9
  other v1: 102.624,76.081 103.624,76.081 102.624,77.081 103.624,77.081
  other v2: 85.6,62.2
IRO: IC1.5 MCU.11 | length 21.7
  Top Layer w0.5: v1(77.546,82.448) 77.546,83.822 77.978,84.254 MCU.11 ; v1(80.391,78.13) 80.391,72.709 v1(81.8,71.3)
  Bottom Layer w0.5: v1(77.546,82.448) 79.756,82.448 80.391,81.813 v1(80.391,78.13) ; IC1.5 80.473,68.135 81.8,69.462 v1(81.8,71.3)
LED1: LED2.1 MCU.14 | length 22.1
  Top Layer w0.5: MCU.14 79.223,80.444 79.223,68.783 80.34,67.666 84.328,67.666 85.877,66.116 85.877,64.884 LED2.1
LED2: LED1.1 MCU.16 | length 20.4
  Top Layer w0.5: v1(83.058,77.038) MCU.16 ; v1(83.8,71.5) 83.8,71.4 86.1,69.1 87,69.1 89.3,66.8 90.266,66.8 90.66,66.406 90.66,66.05 90.678,66.032 90.678,65.556 LED1.1
  Bottom Layer w0.5: v1(83.058,77.038) 83.058,72.142 83.7,71.5 v1(83.8,71.5)
LED3: LED3.1 MCU.13 | length 20.7
  Top Layer w0.5: MCU.13 77.978,81.714 77.546,81.282 77.546,68.894 78.761,67.68 78.761,66.297 LED3.1
MISO: IC1.13 MCU.31 | length 26.6
  Top Layer w0.5: v1(93.9,88.6) 94.436,88.064 MCU.31
  Bottom Layer w0.5: v1(93.9,88.6) 92.9,87.6 92.9,67.608 94.373,66.135 IC1.13
MOSI: IC1.14 MCU.37 | length 36.2
  Top Layer w0.5: v1(93.6,90.7) 93.6,94.8 94.484,95.684 MCU.37
  Bottom Layer w0.5: v1(93.6,90.7) 91.6,88.7 91.6,67.172 93.791,64.981 93.791,64.717 94.373,64.135 IC1.14
NetBOOT_1: BOOT.1 MCU.25 | length 30
  Top Layer w0.5: v1(91.2,93) 90.5,92.3 90.5,84.28 94.336,80.444 MCU.25
  Bottom Layer w0.5: v1(91.2,93) 93.9,95.7 96.886,95.7 BOOT.1
NetC2_2: C2.2 IC2.9 | length 4
  Top Layer w0.254: C2.2 104,72.05 104.523,72.573 104.523,72.721 104.524,72.722 IC2.9
NetD1_1: D1.1 UART.4 | length 7.7
  Bottom Layer w1: D1.1 99,85.9 101.185,88.085 101.185,89.105 UART.4
NetIC2_1: IC2.1 IC2.2 IC2.3 L1.1
NetIC2_4: IC2.4 R1.1 | length 2.8
  Top Layer w0.3: R1.1@99.101,75.626 100.135,75.626 100.34,75.831 IC2.4
  Top Layer w0.5: R1.1@99.001,75.626 R1.1@99.101,75.626
NetLED1_2: LED1.2 R4.2 | length 2.6
  Top Layer w0.5: LED1.2 93.345,65.532 93.585,65.772 R4.2
NetLED2_2: LED2.2 R3.2 | length 2.8
  Top Layer w0.5: LED2.2 88.062,65.52 88.187,65.645 R3.2
NetLED3_2: LED3.2 R5.2 | length 2.8
  Top Layer w0.5: LED3.2 82.423,65.278 82.79,65.645 R5.2
NetLED5_2: LED5.2 R6.2 | length 3
  Top Layer w0.5: LED5.2 91.744,58.956 R6.2
NSS: IC1.15 MCU.26 | length 24.2
  Top Layer w0.5: MCU.26 97.028,81.714 97.663,81.079 v1(97.663,79.477) ; v1(97.055,62.135) 97.2,62.28 97.2,69.772 96.8,70.172 96.8,73.2 97.4,73.8 v1(98.1,73.8)
  Bottom Layer w0.5: IC1.15 v1(97.055,62.135) ; v1(97.663,79.477) 97.773,79.367 97.773,74.127 v1(98.1,73.8)
RST: IC1.4 MCU.24 | length 32.9
  Top Layer w0.5: v1(83.337,81.483) 92.177,81.483 93.218,80.442 MCU.24
  Bottom Layer w0.5: IC1.4 77.393,66.135 77.1,66.428 77.1,75.398 78.105,76.403 80.173,76.403 83.337,79.567 v1(83.337,81.483)
RX0: MCU.34 UART.3 | length 5.3
  Top Layer w0.5: MCU.34 98.577,91.874 98.691,91.76 UART.3
RX2: GPS.2 MCU.27 | length 32
  Top Layer w0.5: v1(91.9,91.8) 91.9,85.191 94.107,82.984 MCU.27
  Bottom Layer w0.5: v1(91.9,91.8) 94.5,94.4 96.822,94.4 100.517,98.095 102.616,98.095 103.886,96.825 103.886,94.234 GPS.2
SCK: IC1.12 MCU.30 | length 22.5
  Top Layer w0.5: v1(94.4,86.4) 94.594,86.594 95.803,86.594 MCU.30
  Bottom Layer w0.5: v1(94.4,86.4) 94.2,86.2 94.2,77.863 97,75.063 97,69.262 95.873,68.135 IC1.12
TX0: MCU.35 UART.2 | length 5.8
  Top Layer w0.5: MCU.35 100.144,93.144 UART.2
TX2: GPS.3 MCU.28 | length 15
  Top Layer w0.5: MCU.28 97.284,84.254 97.612,84.582 97.612,86.233 99.009,87.63 99.009,89.916 99.568,90.475 105.105,90.475 GPS.3
VIN: C1.2 D1.2 IC2.10 IC2.11 IC2.12 IC2.13 J4.1 | length 13.8
  Top Layer w0.254: IC2.13 104.319,77.981 104.6,77.7 104.6,77.333 104.598,77.331 IC2.12
  Bottom Layer w1: D1.2 99,75.361 102.489,71.872 J4.1
pads on no net: IC1.6 IC1.7 IC1.8 IC1.10 IC1.11 IC2.17@103.124,76.581 MCU.4 MCU.5 MCU.6 MCU.7 MCU.8 MCU.9 MCU.10 MCU.12 MCU.17 MCU.18 MCU.19 MCU.20 MCU.21 MCU.22 MCU.23 MCU.29 MCU.32 MCU.33 MCU.36

## Polygon pours and split planes (outlines as drawn)
GND on Top Layer "GND_L01_P008" (solid, pour order 8): 77.4,98.1 77.4,96.2 77.5,96.3 81.7,96.3 84,94 84,86.9 81.1,84 81.1,73 84.4,73 84.4,76.2 83.2,76.2 82.4,77 82.5,77.1 82.5,84 85.4,86.9 89.4,86.9 89.4,92.1 93.7,96.4 99.3,96.4 100,95.7 103.5,95.7 103.5,94.2 104,93.7 107.9,93.7 107.9,100.2 105.5,102.6 103.4,102.6 103.4,99.1 102.4,98.1
GND on Top Layer "GND_L01_P012" (solid, pour order 12): 82.8,64.5 85.3,64.5 85.3,63 85.4,62.9 88.1,62.9 88.1,64.2 88.5,64.6 90.8,64.6 90.8,63.5 91.1,63.2 93.3,63.2 93.3,64.4 93.6,64.7 95.7,64.7 95.7,62.6 95.7,62.5 95.7,62.4 89.4,62.4 89.4,60.7 88.5,59.8 83.5,59.8 83.5,58.43 80.9,58.43 80.9,59.8 79.6,59.8 79.6,59.9 79.6,60 79.6,61.7 81.5,61.7 82.8,63
GND on Top Layer "GND_L01_P005" (solid, pour order 5): 102.206,78.299 103.032,78.299 103.032,77.689 103.221,77.5 104,77.5 104,75.7 104.1,75.6 104.1,73.7 103.5,73.1 103.1,73.1 103.1,70.9 103,70.8 101,70.8 101,73.7 102.2,74.9
VIN on Top Layer "VIN_L01_P004" (solid, pour order 4): 104.1,77.981 104.899,77.981 106.13,76.75 108.5,76.75 108.5,67.75 107.75,67 101,67 100.5,67.5 100.5,70.25 106.25,70.25 108,72 108,74.6 105.65,74.6 105.25,75 105.25,76.063 105.207,76.106 104.1,76.106
NetIC2_1 on Top Layer "NETIC2_1_L01_P001" (solid, pour order 1): 102.108,78.613 102.362,78.867 102.362,85.09 100.33,85.09 100.33,78.994 100.457,78.994 101.092,78.359 101.092,76.2 102.108,76.2 102.108,77.216
3V3 on Top Layer "3V3_L01_P000" (solid, pour order 0): 103.124,77.597 103.632,77.597 103.632,78.613 103.886,78.867 105.537,78.867 105.791,79.121 107.696,79.121 107.696,87.63 107.061,88.265 103.124,88.265
GND on Bottom Layer "GND_L02_P011" (solid, pour order 11): 77.5,63 85.7,63 86,62.7 86,60.7 77.92,60.7 77.5,61.12
GND on Bottom Layer "GND_L02_P010" (solid, pour order 10): 88.4,75.1 82.5,69.2 82.5,59.4 85.6,59.4 85.7,59.3 86.4,60 86.55,65.95 90.4,68.9 90.4,75.1
GND on Bottom Layer "GND_L02_P009" (solid, pour order 9): 99.2,61.1 99.2,62.1 103.9,66.8 108.1,66.8 108.1,59.3 107.7,58.9 107.5,59.1 78.1,59.1 77.5,59.7 77.5,61.239

## Silkscreen, mask and mechanical layers (free items; w line width, h text height)
Bottom Overlay:
  drawing of 13 lines, arcs and shapes, not listed
  text "Design By Thamara Banneheka" at 106.8,57.2 h0.3
Mechanical 1:
  lines w0.254: 76.454,57.912 ccw(c77.724,57.912) 77.724,56.642 85.217,56.642 100.203,56.642 107.696,56.642 ccw(c107.696,57.912) 108.966,57.912 108.966,103.886 ccw(c107.696,103.886) 107.696,105.156 89.916,105.156 77.724,105.156 ccw(c77.724,103.886) 76.454,103.886 76.454,57.912

## Dimensions
108.966,103.886 to 76.454,103.886 on Drill Guide
85.217,56.642 to 107.696,105.156 on Drill Guide